# EAGLE board lm386amp (EAGLE 5.07)
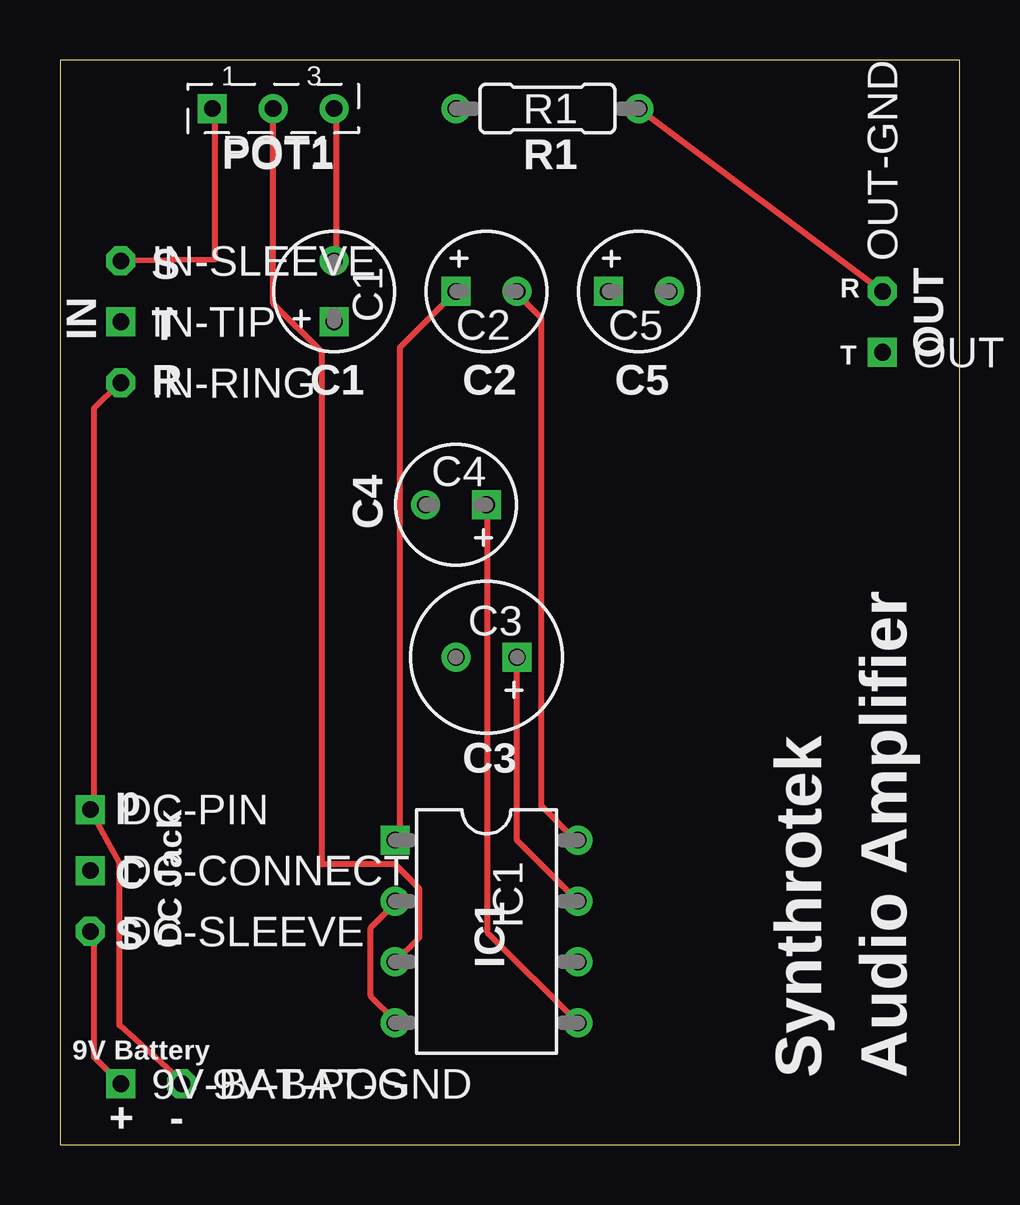
[diagram p0: board, top side]
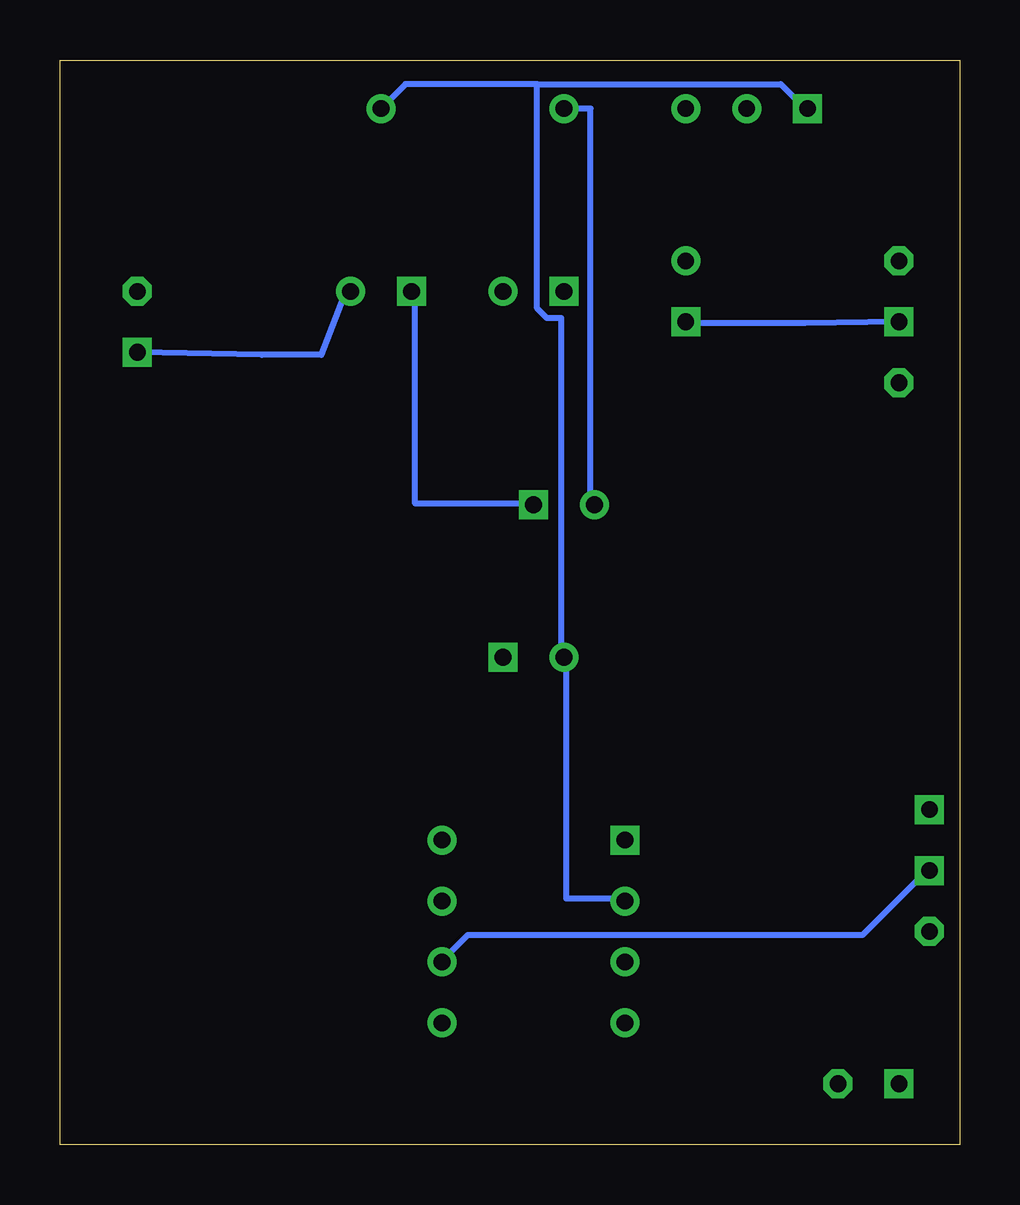
[diagram p1: board, bottom side, seen from below]

Size 37.52 x 45.2 mm. Coordinates in mm from the lower left corner, seen from the top.
Outline: 0,0 37.52,0 37.52,45.2 0,45.2 0,0
Copper layers (1*16): Top 0.035mm / dielectric 1.5mm / Bottom 0.035mm
Design rules "default": minimum track width 10mil, minimum drill 24mil, track to track 8mil, track to pad 8mil, pad to pad 8mil, via to via 8mil, smd to smd 8mil, copper to edge 40mil, drill to drill 8mil, minimum pad ring 10mil, minimum via ring 8mil, stop-mask expansion 4mil, vias tented up to drill 0mil, thermal gap 10mil

## Footprints (pad centres in the part's own frame; a part is rotated, then mirrored left to right if it is on the bottom)
OCTOGON = drill 0.7 octagon: 1 0,0
SQUARE = drill 0.7 square: 1 0,0
050_020_1 = drill 0.7 square: + -1.27,0 | drill 0.7 round: - 1.27,0
063_025 = drill 0.7 square: + -1.27,0 | drill 0.7 round: - 1.27,0
DIL08 = drill 0.7 square: 1 -3.81,-3.81 | drill 0.7 round: 2 -1.27,-3.81; 3 1.27,-3.81; 4 3.81,-3.81; 5 3.81,3.81; 6 1.27,3.81; 7 -1.27,3.81; 8 -3.81,3.81
POT = drill 0.7 square: 1 2.54,0 | drill 0.7 round: 2 0,0; 3 -2.54,0
R0207/3 = drill 0.7 round: 1 -3.81,0; 2 3.81,0

## Placement (x,y rotation side)
9V-BAT-GND  [OCTOGON]  5.08,2.54 0 top
9V-BAT-POS  [SQUARE]  2.54,2.54 0 top
C1  [050_020_1]  11.43,35.56 90 top
C2  [050_020_1]  17.78,35.56 0 top
C3  [063_025]  17.78,20.32 180 top
C4  [050_020_1]  16.51,26.67 180 top
C5  [050_020_1]  24.13,35.56 0 top
DC-CONNECT  [SQUARE]  1.27,11.43 0 top
DC-PIN  [SQUARE]  1.27,13.97 0 top
DC-SLEEVE  [OCTOGON]  1.27,8.89 0 top
IC1  LM386  [DIL08]  17.78,8.89 270 top
IN-RING  [OCTOGON]  2.54,31.75 0 top
IN-SLEEVE  [OCTOGON]  2.54,36.83 0 top
IN-TIP  [SQUARE]  2.54,34.29 0 top
OUT  [SQUARE]  34.29,33.02 0 top
OUT-GND  [OCTOGON]  34.29,35.56 90 top
POT1  [POT]  8.89,43.18 180 top
R1  [R0207/3]  20.32,43.18 180 top

## Library data of the parts
9V-BAT-GND 9V-BAT-POS DC-CONNECT DC-PIN DC-SLEEVE IN-RING IN-SLEEVE IN-TIP OUT OUT-GND = gm-supply
C1-C5 = gm-caps-electro-pol
IC1 = gm-ics
POT1 = gm-pots
R1 = gm-resistors

## Nets
+9V: DC-CONNECT.1 IC1.6
GND: C3.- IC1.2 IC1.4 IN-SLEEVE.1 OUT-GND.1 POT1.1 R1.1
N$1: IC1.3 POT1.2
N$2: C1.- POT1.3
N$3: C1.+ IN-TIP.1
N$5: C2.+ IC1.1
N$6: C3.+ IC1.7
N$7: C2.- IC1.8
N$8: C4.+ C5.+ IC1.5
N$9: C4.- R1.2
N$10: C5.- OUT.1
N$11: 9V-BAT-POS.1 DC-SLEEVE.1
N$12: 9V-BAT-GND.1 DC-PIN.1 IN-RING.1

## Tracks (layer width: path | path; a pad name or v marks a point on that pad's centre or on a via)
+9V
  Bottom 0.254: DC-CONNECT.1 1.42,11.38 4.06,8.74 20.52,8.74 21.54,7.72 IC1.6
GND
  Top 0.254: IC1.4 13.97,5.18 12.95,6.2 12.95,9.04 13.97,10.06 IC1.2 | IN-SLEEVE.1 6.45,36.88 6.45,43.18 POT1.1 | R1.1 OUT-GND.1
  Bottom 0.254: IC1.2 13.97,10.26 16.41,10.26 16.41,20.22 C3.- 16.61,20.42 16.61,34.44 17.22,34.44 17.63,34.85 17.63,44.2 | 17.63,44.2 23.11,44.2 R1.1 | 17.63,44.2 7.47,44.2 6.45,43.18 POT1.1
N$1
  Top 0.254: IC1.3 14.99,8.64 14.99,10.67 13.97,11.68 10.92,11.68 10.92,33.02 8.89,35.05 POT1.2
N$2
  Top 0.254: C1.- 11.53,36.88 11.53,43.18 POT1.3
N$3
  Bottom 0.254: IN-TIP.1 6.45,34.24 11.33,34.24 C1.+
N$5
  Top 0.254: IC1.1 14.17,12.9 14.17,33.22 C2.+
N$6
  Top 0.254: IC1.7 19.05,12.7 C3.+
N$7
  Top 0.254: IC1.8 21.49,12.7 20.07,14.12 20.07,34.44 19.05,35.46 C2.-
N$8
  Top 0.254: IC1.5 17.83,8.84 17.83,26.52 C4.+
  Bottom 0.254: C5.+ 22.71,35.46 22.71,26.72 17.83,26.72 C4.+
N$9
  Bottom 0.254: C4.- 15.39,26.72 15.39,43.18 R1.2
N$10
  Bottom 0.254: C5.- 25.55,35.66 26.62,32.92 29.11,32.92 OUT.1
N$11
  Top 0.254: 9V-BAT-POS.1 1.42,3.66 1.42,8.74 DC-SLEEVE.1
N$12
  Top 0.254: 9V-BAT-GND.1 5.08,2.64 2.49,4.98 2.49,11.73 DC-PIN.1 1.42,14.02 1.42,30.68 2.44,31.7 IN-RING.1
  Bottom 0.254: DC-PIN.1 1.42,14.02

## Text on the board
tPlace: POT1 | R1 | S | R | IN | T | T | OUT | R | C1 | C2 | C5 | C4 | C3 | p | DC Jack | C | S | IC1 | 9V Battery | Synthrotek | Audio Amplifier | + | -